# Altium PCB 半桥模块1.PcbDoc
Units mm, origin at the board's own origin, x right, y up, seen from the top; angles counter-clockwise.
Board outline 97.41 x 65.41 mm, 2 copper layers (Top Layer, Bottom Layer); 26 components, 16 nets, 78 pads, 0 vias.
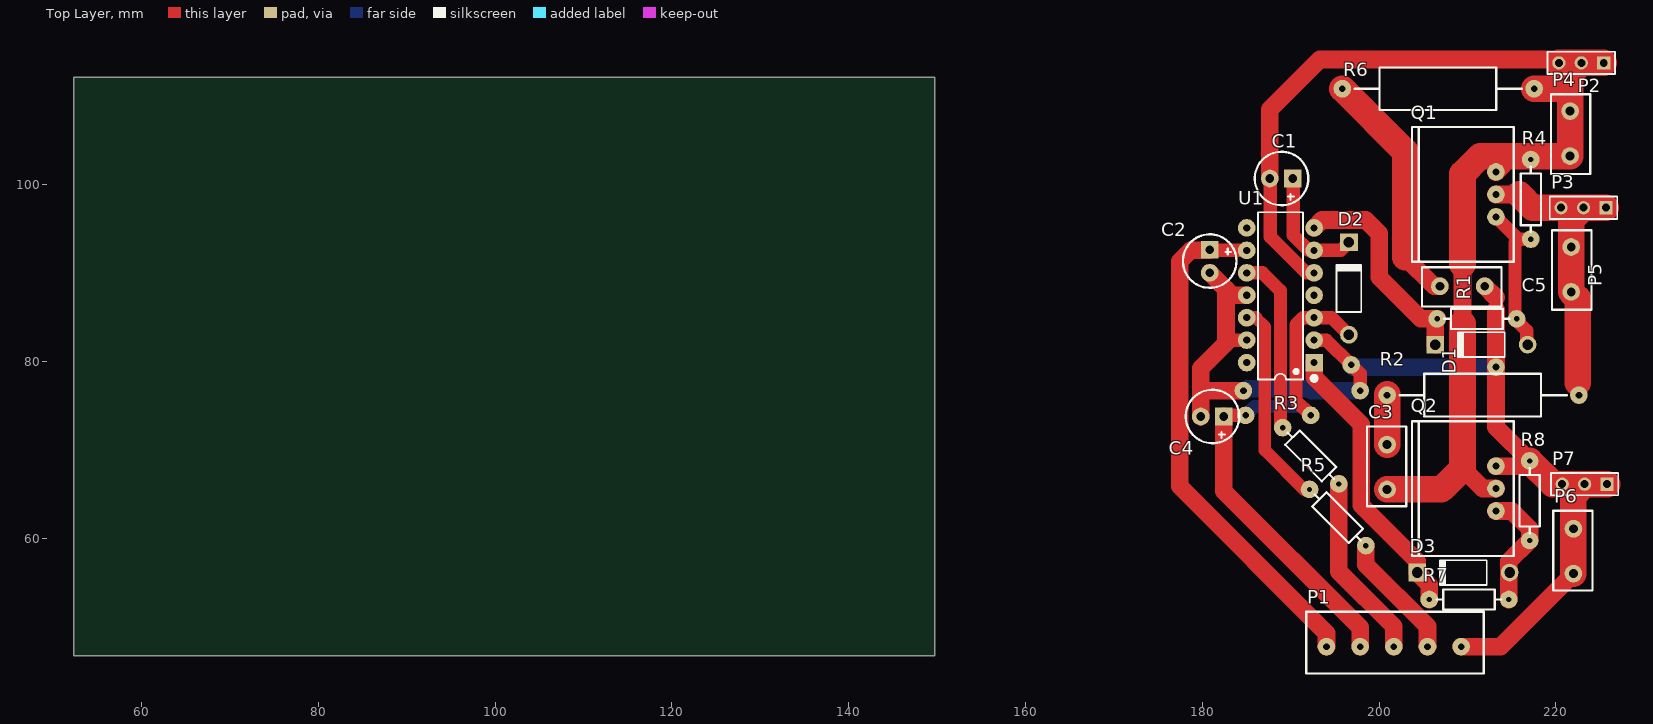
[diagram p0: Top Layer view]
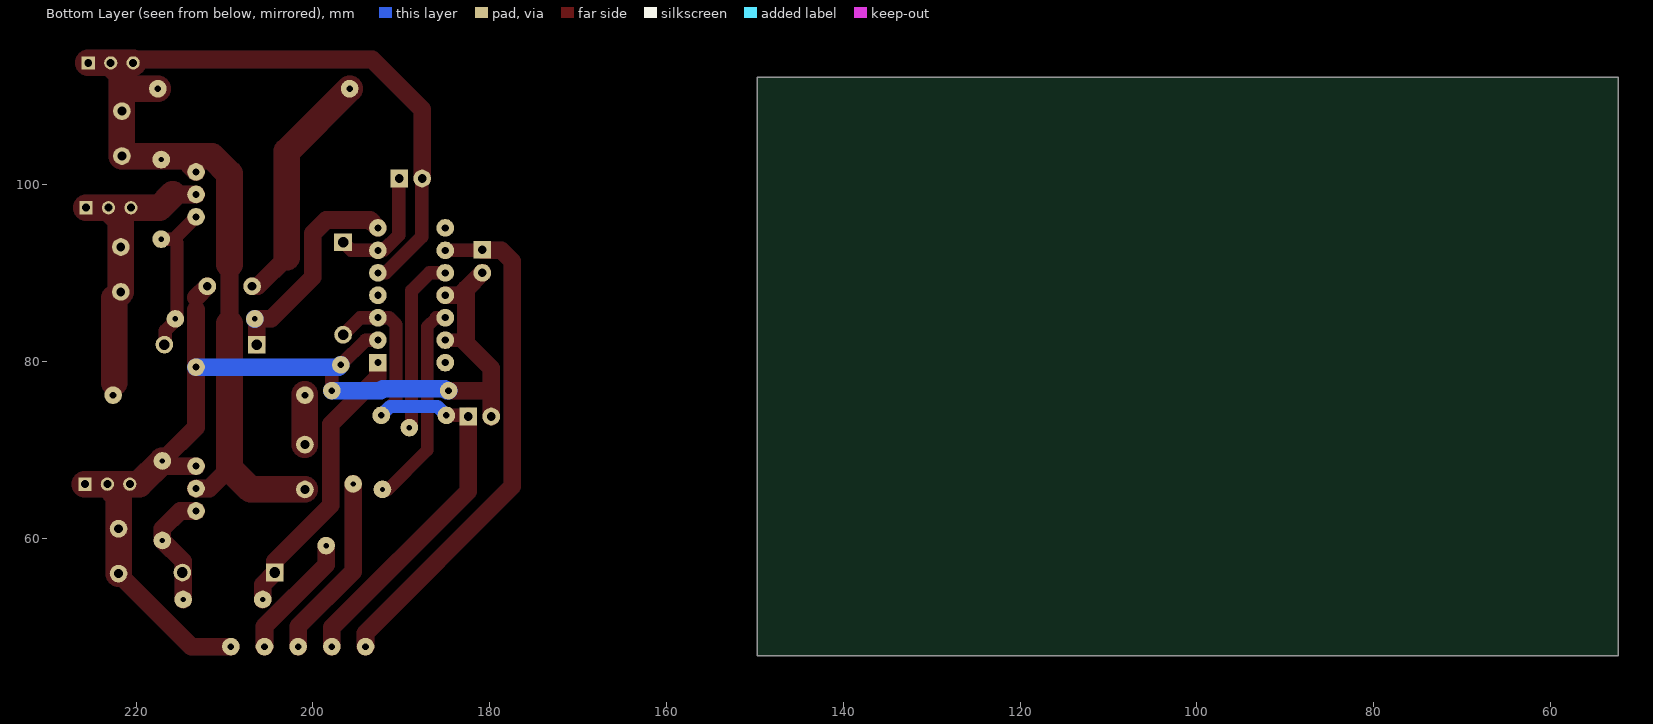
[diagram p1: Bottom Layer view, seen from below]

## Layer stack, top to bottom
Top Solder: solder mask 0.0102, Solder Resist, Dk 3.5
Top Layer: signal copper 0.0356
Dielectric 1: dielectric 0.32, FR-4, Dk 4.8
Bottom Layer: signal copper 0.0356
Bottom Solder: solder mask 0.0102, Solder Resist, Dk 3.5

## Board outline
52.324,46.736 52.324,112.141 149.733,112.141 149.733,46.736

## Design rules (kind name [scope] priority, off if disabled: settings)
Clearance [All] p1: gap=0.254 ignorepadtopadclearanceinfootprint=FALSE except(0: Arc-Hole Track-Hole SMDPad-Hole THPad-Hole Via-Hole Fill-Hole Poly-Hole Region-Hole Text-Hole)
PolygonConnect [All] p1: connectstyle=Relief reliefconductorwidth=0.254 reliefentries=4 polygonreliefangle="90 Angle" airgapwidth=0.254
RoutingVias [All] p1: holewidth=0.711 width=1.27 viastyle="Through Hole" minholewidth=0.711 minwidth=1.27 maxholewidth=0.711 maxwidth=1.27
SolderMaskExpansion [All] p1: expansion=0.102
Width [All] p1: maxlimit=4 minlimit=0.254 preferedwidth=0.254
30 further rules are at their usual default settings.

## Components (designator, comment, footprint, x,y, rotation, side; value= is the part's Value field where it differs from the comment)
C1 "Cap2" C-10uF 190.246,100.711 r180 top value=10uF
C2 "Cap2" C-10uF 180.848,92.643 r270 top value=10uF
C3 "Cap" DuanZi 200.914,65.532 r90 top value=470nF
C4 "Cap2" C-10uF 182.432,73.787 r180 top value=100uF
C5 "Cap" DuanZi 211.963,88.519 r180 top value=470nF
D1 "Diode" DO-41 211.582,81.915 r180 top
D2 "Diode" DO-41 196.596,88.265 r90 top
D3 "Diode" DO-41 209.55,56.134 r180 top
P1 "Header 5" 3.81mm_5 194.056,47.752 r0 top
P2 "Header 3" HDR1X3 225.425,113.792 r180 top
P3 "Header 3" HDR1X3 225.679,97.409 r180 top
P4 "Header 2" DuanZi 221.615,108.331 r270 top
P5 "Header 2" DuanZi 221.742,92.964 r270 top
P6 "Header 2" DuanZi 221.996,56.007 r90 top
P7 "Header 3" HDR1X3 225.806,66.135 r180 top
Q1 "NMOS-2" MOS 213.233,96.37 r90 top
Q2 "NMOS-2" MOS 213.233,63.096 r90 top
R1 "Res2" AXIAL0.4-1/4W 211.074,84.836 r0 top value=27
R2 "Res2" R_5W 200.914,76.2 r0 top value=10
R3 "Res2" AXIAL0.4-1/4W 192.278,69.342 r135 top value=1K
R4 "Res2" AXIAL0.4-1/4W 217.17,98.353 r270 top value=22K
R5 "Res2" AXIAL0.4-1/4W 195.326,62.357 r135 top value=510
R6 "Res2" R_5W 195.851,110.871 r0 top value=10
R7 "Res2" AXIAL0.4-1/4W 210.185,53.086 r0 top value=27
R8 "Res2" AXIAL0.4-1/4W 217.043,64.262 r270 top value=22K
U1 "IR2110" DIP14-300_MH 188.849,87.503 r180 top

## Footprints (in the part's own frame and the unit in brackets; to place one, negate y for a bottom-side part, rotate by r counter-clockwise, add the part's x,y. Pads: shape width x height; smd on the part's side, far side on the other; paste and mask are expansions set on the pad)
3.81mm_5 [mm]
  round 2 hole 0.762: 1(0,0) 2(3.81,0) 3(7.62,0) 4(11.43,0) 5(15.24,0)
  silkscreen extent -2.29,-3.05 17.78,3.95
AXIAL0.4-1/4W [mm] "脚距9mm，直径2.3mm"
  round 2 hole 0.6: 1(-4.5,0) 2(4.5,0)
  silkscreen extent -3.68,-1.14 3.68,1.14, body extent -4.72,-1.16 4.73,1.16, height 2.32
C-10uF [mm]
  rect 2x2 hole 1: 1(0,0)
  round 2 hole 1: 2(2.6,0)
  silkscreen extent -1.76,-3.03 4.3,3.03
DIP14-300_MH [mm] "带底座  19*7.6*3.8(长宽高）"
  rect 2x2 hole 0.8: 1(-3.81,7.62)
  round 2 hole 0.8: 2(-3.81,5.08) 3(-3.81,2.54) 4(-3.81,0) 5(-3.81,-2.54) 6(-3.81,-5.08) 7(-3.81,-7.62) 8(3.81,-7.62) 9(3.81,-5.08) 10(3.81,-2.54) 11(3.81,0) 12(3.81,2.54) 13(3.81,5.08) 14(3.81,7.62)
  silkscreen extent -4.06,-9.4 2.54,9.65, body extent -5,-9.5 5,9.5, height 7.3
DO-41 [mm] "Diode, Axial; Body 5.2 x 2.7 mm (LxDia. max), Lead Dia. 0.86 mm (max)"
  round 2 hole 1.2: 1(-5.23,0)
  rect 2x2 hole 1.2: 2(5.23,0)
  silkscreen extent -2.65,-1.4 2.75,1.4
DuanZi [mm]
  round 2 hole 1 unplated: 1(0,0) 2(5.08,0)
  silkscreen extent -1.91,-2.16 7.11,2.29
HDR1X3 [mm] "Connector; Header; 3 Position"
  rect 1.5x1.5 hole 0.9: 1(0,0)
  round 1.5 hole 0.9: 2(2.54,0) 3(5.08,0)
  silkscreen extent -1.27,-1.27 6.35,1.27
MOS [mm]
  round 2 hole 0.762: 1(0,0) 2(2.54,0) 3(5.08,0)
  silkscreen extent -5.08,-2 10.16,9.5
R_5W [mm]
  round 2 hole 0.762: 1(0,0) 2(21.7,0)
  silkscreen extent 1.4,-2.41 20.32,2.41

## Part data
C1 C2 C3 C4 C5: "Capacitor", Publisher="Altium Limited"
  C1 C2 C4: PackageDescription="Capacitor; 2 Leads", PackageReference=CAPR5-4X5, Published=23-Sep-2002
  C3 C5: LatestRevisionDate=17-Jul-2002, LatestRevisionNote="Re-released for DXP Platform.", PackageDescription="Radial Cap, Thru-Hole; 2 Leads; 0.3 in Pin Spacing", PackageReference=RAD-0.3, Published=8-Jun-2000
D1 D2 D3: "Default Diode", Code_JEDEC=DO-214-AB, LatestRevisionDate=17-Jul-2002, LatestRevisionNote="Re-released for DXP Platform.", PackageDescription="DO-214-AB/SMC; 2 C-Bend Leads; Body 7.9 x 5.9 mm, inc. leads (LxW)", PackageReference=SMC, PackageVersion=Sep-1996, Published=8-Jun-2000, Publisher="Altium Limited"
P1: "Header, 5-Pin", LatestRevisionDate=17-Jul-2002, LatestRevisionNote="Re-released for DXP Platform.", Publisher="Altium Limited"
P2 P3 P7: "Header, 3-Pin", LatestRevisionDate=17-Jul-2002, LatestRevisionNote="Re-released for DXP Platform.", Publisher="Altium Limited"
P4 P5 P6: "Header, 2-Pin", LatestRevisionDate=17-Jul-2002, LatestRevisionNote="Re-released for DXP Platform.", Publisher="Altium Limited"
Q1 Q2: "N-Channel Power MOSFET", ComponentLink1Description="Manufacturer Link", ComponentLink1URL=http://www.irf.com/, DatasheetVersion=PD-9.814, LatestRevisionDate=17-Jul-2002, LatestRevisionNote="Re-released for DXP Platform.", Note="Pin 2 is electrically connected to pin 4.", PackageDescription="TO, Thru-Hole, Vertical, Heatsink Mounted; 3 In-Line Leads; Pitch 2.54 mm", PackageReference=TO-220AB, PackageVersion=Feb-1997, Published=8-Jun-2000, Publisher="Altium Limited"
R1 R2 R3 R4 R5 R6 R7 R8: "Resistor", LatestRevisionDate=17-Jul-2002, LatestRevisionNote="Re-released for DXP Platform.", PackageDescription="Axial Device, Thru-Hole; 2 Leads; 0.4 in Pin Spacing", PackageReference=AXIAL-0.4, Published=8-Jun-2000, Publisher="Altium Limited"

## Free pads (board coordinates)
  round 2 hole 0.762: 2(192.278,73.914) 3(184.912,73.914) 4(184.658,76.708) 5(197.866,76.708) 6(196.85,79.629) 7(213.233,79.375)

## Nets (pads, with @x,y where several pads share a name; then routed paths per layer and width w, separated by ;. In a path a pad name is that pad's centre, name@x,y a point inside that pad or via, vN(x,y) a via of type N, cw(c..) or ccw(c..) an arc to the next point about the centre after c; other vN are vias at no path point)
1PWM: D1.1 Q1.1 R1.2 R4.2 | length 17.6
  Top Layer w1.5: Q1.1 215.75,93.853 ; D1.1@216.708,81.915 216.708,83.503 215.375,84.836 215.375,93.478 215.75,93.853 ; R4.2 215.75,93.853
2PWM: D3.1 Q2.1 R7.2 R8.2 | length 13.6
  Top Layer w2: Q2.1 215.034,63.096 217.043,61.087 R8.2 214.685,57.404 R7.2
+5V: C2.1 P1.1 U1.9 | length 58.7
  Top Layer w1.5: C2.1@180.788,92.583 U1.9
  Top Layer w2: C2.1 180.788,92.583 178.689,92.583 177.451,91.345 177.451,65.881 194.056,49.276 P1.1
+15V: C4.1 D2.1 P1.2 pad.2 pad.3 U1.3 | length 61.2
  Top Layer w1.5: C4.1 182.559,73.914 pad.3 ; pad.2 190.603,75.589 190.603,84.177 191.389,84.963 U1.3 194.668,84.963 D2.1
  Top Layer w2: C4.1 182.432,65.345 197.866,49.911 P1.2
  Bottom Layer w1.5: pad.3 185.928,74.93 191.262,74.93 pad.2
NetC1_1: C1.1 D2.2 U1.6 | length 13
  Top Layer w1.5: C1.1@190.306,99.949 190.306,94.301 192.024,92.583 U1.6 195.684,92.583 D2.2
NetC3_2: C3.2 R2.1 | length 5.7
  Top Layer w3: C3.2 200.931,70.629 R2.1@200.931,76.327
NetC5_2: C5.2 R6.1 | length 27.3
  Top Layer w2: 202.946,91.821 206.248,88.519 C5.2
  Top Layer w3: R6.1 202.946,103.776 202.946,91.821
NetD1_2: D1.2 R1.1 U1.7 | length 24.7
  Top Layer w2: U1.7 193.548,96.012 198.501,96.012 200.025,94.488 200.025,89.535 204.724,84.836 R1.1@206.375,84.836 ; D1.2 206.352,84.614 R1.1
  Bottom Layer w2: R1.1@206.574,84.781 R1.1
NetD3_2: D3.2 R7.1 U1.1 | length 32.2
  Top Layer w2: U1.1 192.659,78.232 197.993,72.898 197.993,63.754 204.32,57.427 D3.2 205.685,54.769 R7.1
NetP3_1: P3.1 P3.2 P3.3 P5.1 P5.2 Q1.2 R2.2 | length 33.8
  Top Layer w2: Q1.2 215.877,98.91
  Top Layer w3: 215.877,98.91 217.378,97.409 P3.3 P3.2 ; 222.487,77.597 222.487,87.139 P5.2 P5.1 221.742,96.012 P3.2 ; P3.1 P3.2
NetR3_2: R3.2 U1.10 | length 20.2
  Top Layer w1.5: U1.10 186.817,90.043 188.849,88.011 188.849,72.771 R3.2
NetR5_2: R5.2 U1.12 | length 22.9
  Top Layer w1.4: 186.055,84.963 187.071,83.947 187.071,69.977 R5.2@191.636,65.412
  Top Layer w1.5: U1.12 186.055,84.963
PWM1: P1.3 R3.1 | length 21
  Top Layer w2: R3.1 195.46,56.254 201.676,50.038 P1.3
PWM2: P1.4 R5.1 | length 14.3
  Top Layer w2: R5.1 198.508,57.016 205.486,50.038 P1.4
SGND: C2.2 C4.2 C5.1 P1.5 P6.1 P6.2 P7.1 P7.2 P7.3 pad.4 pad.5 pad.6 pad.7 Q2.3 R8.1 U1.2 U1.11 U1.13 | length 127
  Top Layer w1.5: 183.007,82.423 U1.13 ; U1.2 194.056,82.423 pad.6 197.866,78.613 pad.5
  Top Layer w2: C4.2 179.832,77.089 ; C2.2 182.689,88.201 ; pad.4 180.213,76.708 179.832,77.089 ; U1.11 183.388,87.503 182.689,88.201 ; P1.5 213.741,47.752 P6.1 ; C5.1 213.233,87.249 ; Q2.3 R8.1@216.431,68.176 ; 213.233,85.852 pad.7 213.233,72.572 R8.1 ; 179.832,77.089 179.832,79.248 183.007,82.423 182.689,82.74 182.689,88.201
  Top Layer w3: R8.1 219.67,66.135 P7.3 P7.2 ; P6.1 P6.2 221.996,64.865 P7.2 ; P7.1 P7.2
  Bottom Layer w2: pad.4 184.872,76.708 185.098,76.934 192.092,76.934 192.318,76.708 pad.5 ; pad.6 197.104,79.375 pad.7
VS1: C1.2 C3.1 P2.1 P2.2 P2.3 P4.1 P4.2 Q1.3 Q2.2 R4.1 R6.2 U1.5 | length 137.5
  Top Layer w1.5: C1.2@187.706,99.949 187.706,94.107 191.77,90.043 U1.5
  Top Layer w2: C1.2 187.646,108.525 193.294,114.173 219.964,114.173 P2.3 ; 209.446,67.922 211.732,65.636 Q2.2 ; 209.446,85.702 209.446,91.036 ; Q1.3 215.034,103.251
  Top Layer w3: C3.1 207.056,65.532 209.446,67.922 209.446,84.305 ; 209.446,91.036 209.446,101.242 211.455,103.251 215.034,103.251 P4.2 P4.1 221.615,110.998 ; R6.2 221.488,110.871 221.615,110.998 ; P2.3 P2.2 ; P2.1 P2.2 ; 221.615,110.998 221.615,112.522 P2.2
pads on no net: U1.4 U1.8 U1.14

## Silkscreen, mask and mechanical layers (free items; w line width, h text height)
Mechanical 1:
  lines w0.2: 52.324,46.736 52.324,112.141 149.733,112.141 149.733,46.736